# EAGLE board breadboard-E12 (EAGLE 7.4.0)
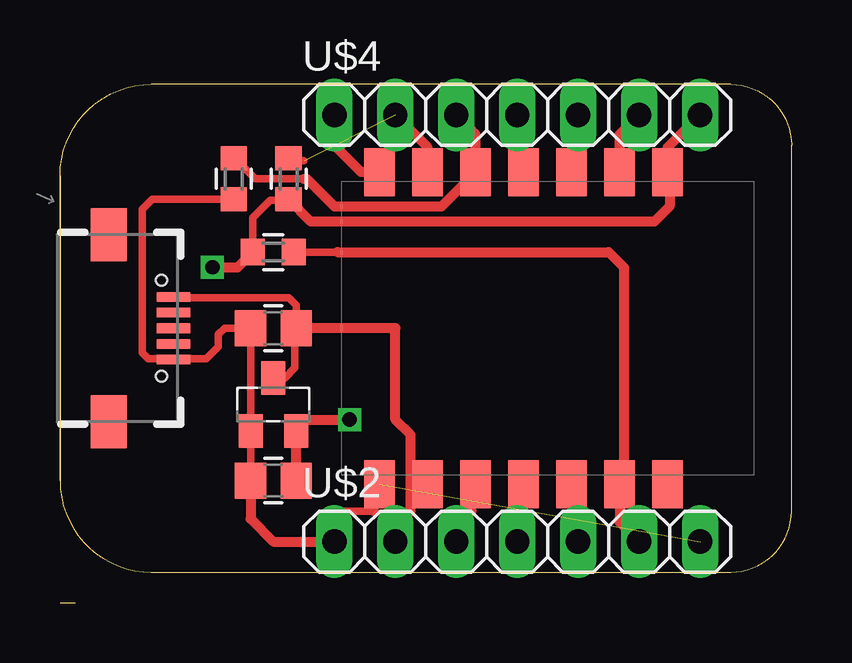
[diagram p0: board, top side]
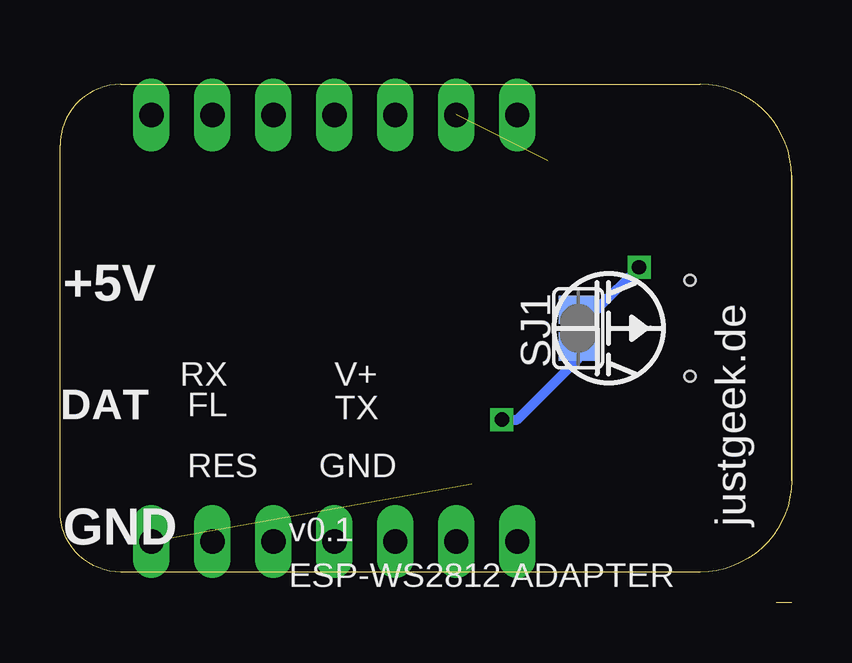
[diagram p1: board, bottom side, seen from below]

Size 30.48 x 21.59 mm. Coordinates in mm from the lower left corner, seen from the top.
Outline: 0,5.08 0,11.43 0,17.78
Outline: 0,17.78 arc-90 3.81,21.59 27.94,21.59 arc-90 30.48,19.05 30.48,3.81 arc-90 27.94,1.27 3.81,1.27 arc-90 0,5.08
Outline: 0,17.78 0,5.08
Outline: 0,0 0.64,0
Copper layers (1*16): Top 0.0356mm / dielectric 1.5011mm / Bottom 0.0356mm
Design rules "oshpark": minimum track width 6mil, minimum drill 13mil, track to track 6mil, track to pad 6mil, pad to pad 6mil, via to via 6mil, smd to smd 6mil, copper to edge 15mil, drill to drill 6mil, minimum pad ring 7mil, minimum via ring 7mil, stop-mask expansion 4mil, vias tented up to drill 4.1mm, thermal gap 10mil

## Footprints (pad centres in the part's own frame; a part is rotated, then mirrored left to right if it is on the bottom)
C0805 = smd 1.3 x 1.5: 1 -0.95,0; 2 0.95,0
USB-MICRO-SMD-NO_CENTER = smd 1.4 x 0.4: D+ 1.43,0; D- 1.43,0.65; GND 1.43,-1.3; ID 1.43,-0.65; VUSB 1.43,1.3 | smd 1.5 x 2.2: P$1 -1.27,3.9; P$2 -1.27,-3.9 | hole 0.45: 0.93,2; 0.93,-2
R0603 = smd 1 x 1.1: 1 -0.85,0; 2 0.85,0
SJ = smd 1.168 x 1.6: 1 -0.762,0; 2 0.762,0
SOT23 = smd 1 x 1.4: P$1 -0.95,-1.1; P$2 0.95,-1.1; P$3 0,1.1
ESP8266-ESP-03 = smd 1.27 x 2: P$1 7,6.5; P$2 5,6.5; P$3 3,6.5; P$4 1,6.5; P$5 -1,6.5; P$6 -3,6.5; P$7 -5,6.5; P$8 -5,-6.5; P$9 -3,-6.5; P$10 -1,-6.5; P$11 1,-6.5; P$12 3,-6.5; P$13 5,-6.5; P$14 7,-6.5
PINHEADER-100MIL-1X7 = drill 1.016 long: 1 -7.62,0; 2 -5.08,0; 3 -2.54,0; 4 0,0; 5 2.54,0; 6 5.08,0; 7 7.62,0

## Placement (x,y rotation side)
C1  1uF  [C0805]  8.89,11.43 180 top
C2  1uF  [C0805]  8.89,5.08 180 top
CON1  USBMICRO-NO_CENTER  [USB-MICRO-SMD-NO_CENTER]  3.3,11.43 0 top
R1  10k  [R0603]  7.24,17.65 270 top
R2  10k  [R0603]  9.53,17.65 270 top
R3  10k  [R0603]  8.89,14.61 180 top
SJ1  [SJ]  8.89,11.43 90 bottom
U1  [SOT23]  8.89,8.26 0 top
U$1  ESP8266-03  [ESP8266-ESP-03]  20.32,11.43 180 top
U$2  GENERIC-1X7  [PINHEADER-100MIL-1X7]  19.05,2.54 0 top
U$3  [LOGO-JUSTGEEK-XS]  7.62,11.43 90 bottom
U$4  GENERIC-1X7  [PINHEADER-100MIL-1X7]  19.05,20.32 0 top

## Library data of the parts
C1 C2 R1-R3 = p.peter-rcl
CON1 U$2 U$4 = p.peter-connectors
SJ1 = jumper
U1 = p.peter-regulators
U$1 = p.peter-periphery
U$3 = p.peter-doc

## Nets
+3V3: R2.2 R3.2 SJ1.2 U$1.P$8 U$4.7
+5V: C1.1 CON1.VUSB U1.P$3 U$2.2
FLASH: U$1.P$14 U$4.1
GND: C1.2 C2.2 CON1.GND R1.2 U1.P$1 U$1.P$1 U$2.1 U$2.7
IO02: R2.1 U$1.P$13 U$4.2
IO12: U$1.P$10 U$4.5
IO13: U$1.P$11 U$4.4
IO14: U$1.P$9 U$4.6
IO15: R1.1 U$1.P$12 U$4.3
IO16: U$1.P$5 U$2.5
N$1: C2.1 SJ1.1 U1.P$2
RESET: R3.1 U$1.P$6 U$2.6
RX: U$1.P$4 U$2.4
TX: U$1.P$3 U$2.3

## Tracks (layer width: path | path; a pad name or v marks a point on that pad's centre or on a via)
+3V3  (via drill 0.6)
  Top 0.305: 8.13,14.82 R3.2 8.04,16.04 8.76,16.76 9.49,16.76 R2.2
  Top 0.406: U$4.7 25.32,18.97 U$1.P$8 25.32,17.86 25.4,17.78 25.4,16.51 24.77,15.88 12.06,15.88 10.45,15.88 R2.2 | v6.35,13.97 7.4,13.97 R3.2
  Bottom 0.406: SJ1.2 8.13,12.19 v6.35,13.97
+5V
  Top 0.305: U1.P$3 9.36,9.36 9.78,9.78 9.78,11.37 C1.1 9.84,12.38 9.53,12.7 6.35,12.7 5.27,12.7 CON1.VUSB
  Top 0.406: U$2.2 13.97,3.17 14.61,3.81 14.61,6.99 13.97,7.62 13.97,11.43 C1.1
FLASH
  Top 0.406: U$1.P$14 12.55,17.93 12.06,18.41 11.43,19.05 U$4.1
GND  (1 unrouted)
  Top 0.305: C2.2 U1.P$1 C1.2 6.86,11.43 6.6,11.18 6.6,10.67 6.1,10.16 4.76,10.16 CON1.GND 5.21,10.16 3.68,10.16 3.43,10.41 3.43,16.38 3.85,16.8 R1.2 | 11.43,3.81 12.7,3.81 13.08,3.81
  Top 0.406: 11.43,3.81 U$2.1 8.89,2.54 7.94,3.49 C2.2 | 13.08,3.81 13.08,4.69 U$1.P$1
IO02  (1 unrouted)
  Top 0.305: 10.16,18.41 9.61,18.41 R2.1
  Top 0.406: U$1.P$13 15.32,18.97 U$4.2
IO12
  Top 0.406: U$1.P$10 21.32,18.14 21.59,18.41 U$4.5
IO13
  Top 0.406: U$1.P$11 19.32,18.14 19.05,18.41 U$4.4
IO14
  Top 0.406: U$1.P$9 23.32,19.51 U$4.6
IO15
  Top 0.305: R1.1 7.28,18.5 8.13,17.65 10.16,17.65
  Top 0.406: U$4.3 17.15,19.68 17.32,19.51 U$1.P$12 15.9,16.51 11.43,16.51 10.29,17.65 10.16,17.65
IO16
  Top 0.406: U$1.P$5 21.32,4.71 21.59,4.45 U$2.5
N$1  (via drill 0.6)
  Top 0.406: C2.1 U1.P$2 9.84,7.3 10.16,7.62 v12.06,7.62
  Bottom 0.406: v12.06,7.62 11.43,7.62 8.89,10.16 SJ1.1
RESET
  Top 0.305: R3.1 9.91,14.86 10.16,14.61 11.56,14.61
  Top 0.406: U$2.6 23.32,3.35 U$1.P$6 23.5,5.11 23.5,13.97 22.86,14.61 11.56,14.61
RX
  Top 0.406: U$1.P$4 19.32,4.71 19.05,4.45 U$2.4
TX
  Top 0.406: U$2.3 16.51,3.17 17.15,3.81 17.15,4.75 U$1.P$3

## Text on the board
bPlace: +5V | V+ | RX | TX | FL | DAT | GND | RES | justgeek.de | v0.1 | GND | ESP-WS2812 ADAPTER